# EAGLE board mechanical-endstop-shapeoko (EAGLE 6.2)
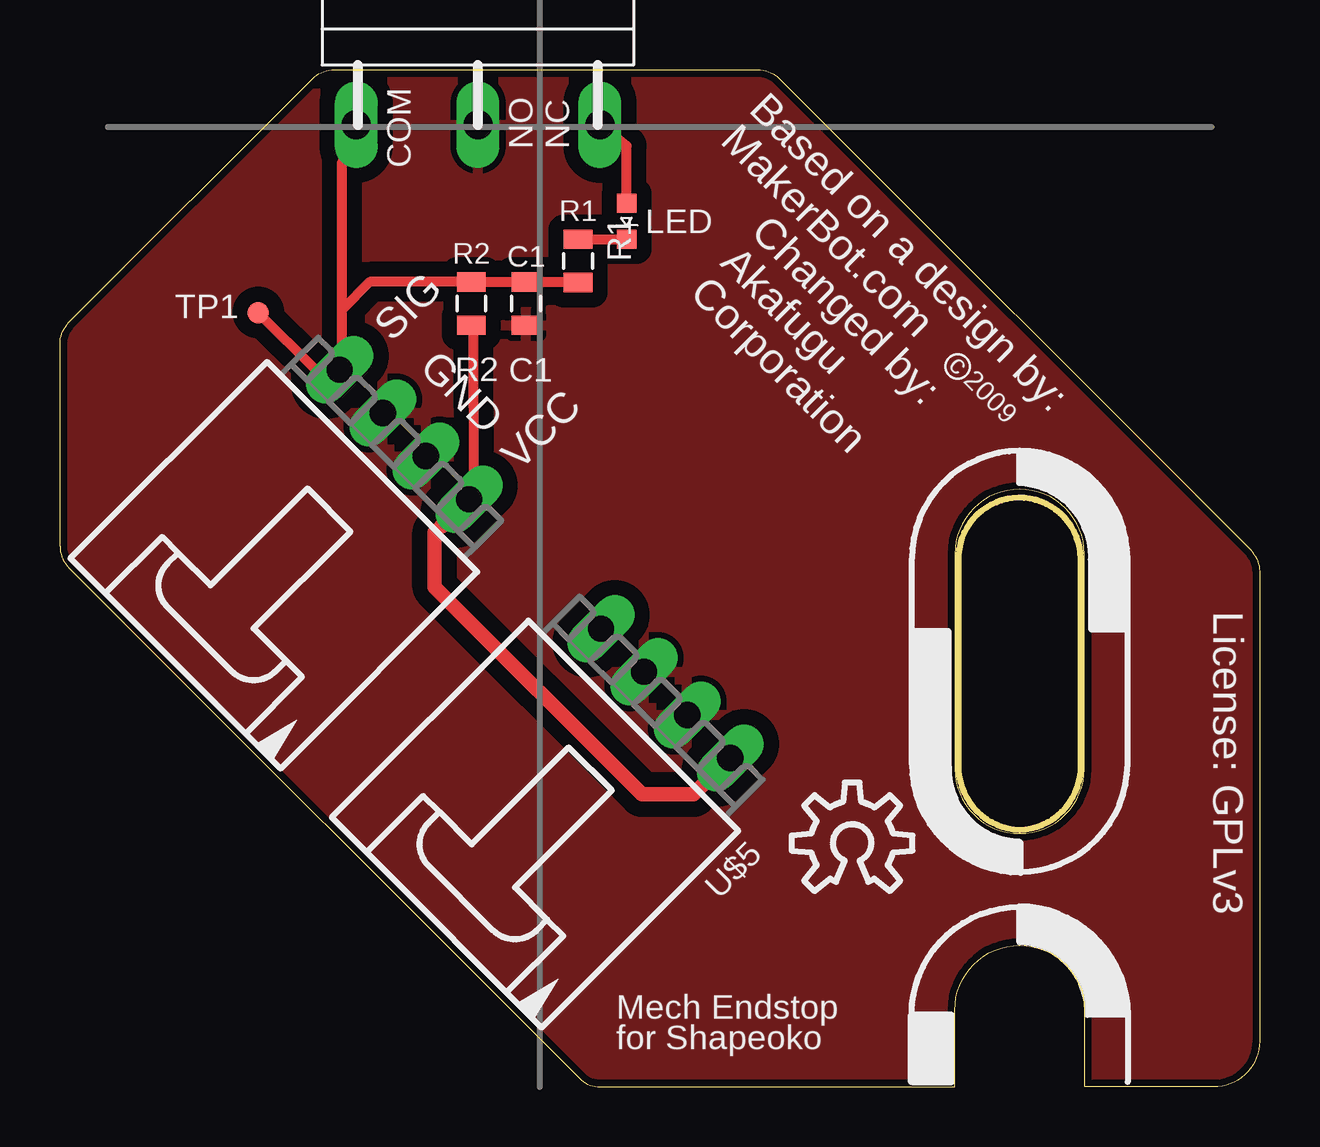
[diagram p0: board, top side]
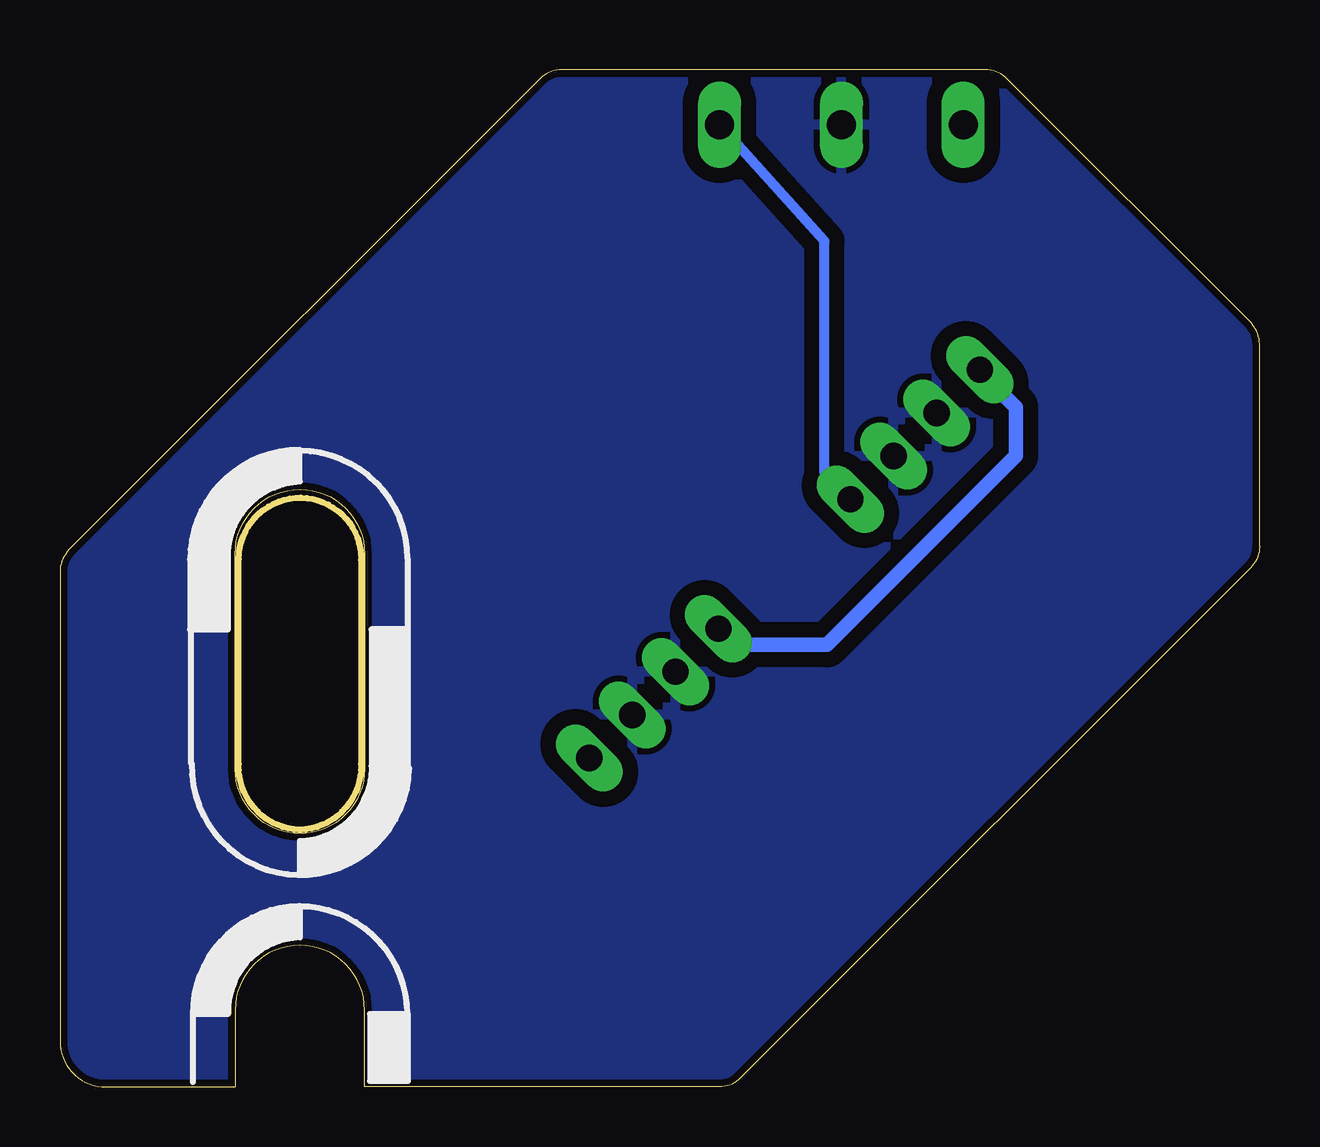
[diagram p1: board, bottom side, seen from below]

Size 50 x 42.38 mm. Coordinates in mm from the lower left corner, seen from the top.
Outline: 37.3,0 37.3,3.2 arc-180 42.7,3.2 42.7,0 48.09,0 arc90 50,1.91 50,21.47 arc45 49.63,22.37 29.99,42.01 arc45 29.09,42.38 11.43,42.38 arc45 10.53,42.01 0.37,31.85 arc45 0,30.95 0,22.53 arc45 0.37,21.63 21.63,0.37 arc45 22.53,0 37.3,0
Outline: 42.7,22.2 arc180 37.3,22.2 37.3,13.26 arc180 42.7,13.26 42.7,22.2
Copper layers (1*16): Top 0.035mm / dielectric 1.5mm / Bottom 0.035mm
Design rules "default": minimum track width 8mil, minimum drill 16mil, track to track 8mil, track to pad 8mil, pad to pad 8mil, via to via 8mil, smd to smd 0mil, copper to edge 12mil, drill to drill 10mil, minimum pad ring 10mil, minimum via ring 6mil, stop-mask expansion 2mil, vias tented up to drill 45mil, thermal gap 10mil
Net classes: 0 default: width 0.813 mm, drill 0.635 mm, clearance 0.635 mm
Milling: area 37.5,10.7 to 42.5,24.6

## Footprints (pad centres in the part's own frame; a part is rotated, then mirrored left to right if it is on the bottom)
0805-CAP = smd 0.8 x 1.2: 1 -0.9,0; 2 0.9,0
LED-0603 = smd 0.8 x 0.8: A -0.75,0; C 0.75,0
R0805 = smd 0.8 x 1.2: 1 -0.9,0; 2 0.9,0
TP09R = smd 0.9 x 0.9: TP 0,0
70553-04 = drill 1.092 long: 1 -3.81,-7.62; 2 -1.27,-7.62; 3 1.27,-7.62; 4 3.81,-7.62
OMRON-D2F-A = drill 1.2 long: COM -5.08,0; NC 5.08,0; NO 0,0

## Placement (x,y rotation side)
C1  0.1uF  [0805-CAP]  19.43,32.64 270 top
DETECT  [LED-0603]  23.62,36.07 270 top
R1  1K  [R0805]  21.59,34.42 90 top
R2  10K  [R0805]  17.14,32.64 270 top
TP1  PTR1TP09R  [TP09R]  8.26,32.26 0 top
U$1  CDROM-HOR  [70553-04]  8.97,21.8 135 top
U$2  OMRON-D2FA  [OMRON-D2F-A]  17.43,40.09 0 top
U$4  OSHW-LOGO-OUTLINE  [OSHW-LOGO-OUTLINE]  33.02,10.16 0 top
U$5  CDROM-HOR  [70553-04]  19.86,11.01 135 top

## Library data of the parts
C1 DETECT R1 R2 U$4 = akafugu
TP1 = testpad
U$1 U$5 = akafugu; EAGLEUP: MOLEX-70553-0038
U$2 = reprap; EAGLEUP: OMRON-D2F-L;MR0

## Nets
GND: C1.2 U$1.2 U$1.3 U$2.NO U$5.2 U$5.3
N$1: DETECT.C R1.2
N$2: C1.1 R1.1 R2.1 TP1.TP U$1.4 U$2.COM U$5.4
VCC: DETECT.A R2.2 U$1.1 U$2.NC U$5.1

## Tracks (layer width: path | path; a pad name or v marks a point on that pad's centre or on a via)
GND
  pour Top: -1.27,50.51 50.64,50.51 50.64,-1.27 -1.27,-1.27
  pour Bottom: -1.27,50.51 50.64,50.51 50.64,-1.27 -1.27,-1.27
N$1
  Top 0.406: R1.2 DETECT.C
N$2
  Top 0.406: TP1.TP 10.67,29.86 11.64,29.86 U$1.4 arc45 11.76,29.92 11.76,32.38 | 11.76,32.38 11.76,38.5 U$2.COM | 11.76,32.38 12.91,33.54 R2.1 C1.1 21.57,33.54 R1.1
  Bottom 0.406: 11.76,29.92 11.7,29.92 U$1.4
  Bottom 0.61: 11.76,29.92 10.16,28.32 10.16,26.29 18.03,18.41 21.88,18.41 U$5.4
VCC
  Top 0.254: 17.24,31.69 R2.2
  Top 0.406: U$1.1 17.27,24.86 17.24,31.69 | DETECT.A 23.62,39.2 U$2.NC
  Top 0.61: U$5.1 27.92,13.7 26.42,12.19 24.26,12.19 15.62,20.83 15.62,23.11 15.88,23.37 15.93,23.37 U$1.1
  Bottom 0.254: U$1.1 16.97,24.48
  Bottom 0.406: 16.97,24.48 17.03,24.48 18.13,25.57 18.13,35.23 U$2.NC

## Text on the board
tPlace: Based on a design by: | MakerBot.com | R1 | LED | Changed by: | R2 | C1 | Akafugu | Corporation | SIG | GND | c 2009 | VCC | License: GPLv3 | Mech Endstop | for Shapeoko